# Altium PCB PCB1.PcbDoc
Units mil, origin at the board's own origin, x right, y up, seen from the top; angles counter-clockwise.
Board outline 3885.03 x 1650.02 mil, 2 copper layers (Top Layer, Bottom Layer); 11 components, 7 nets, 23 pads, 0 vias.
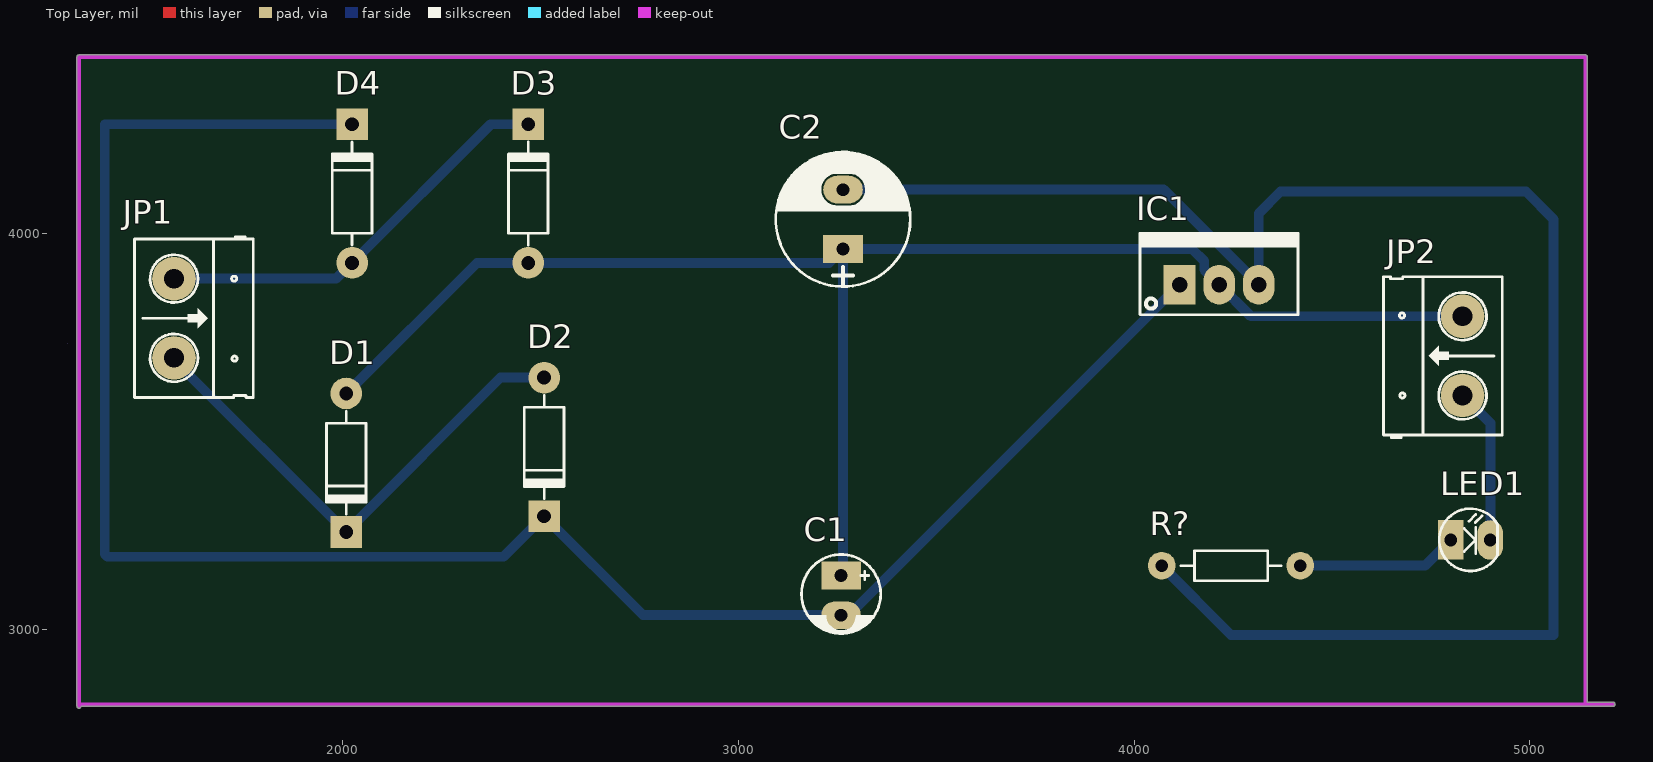
[diagram p0: Top Layer view]
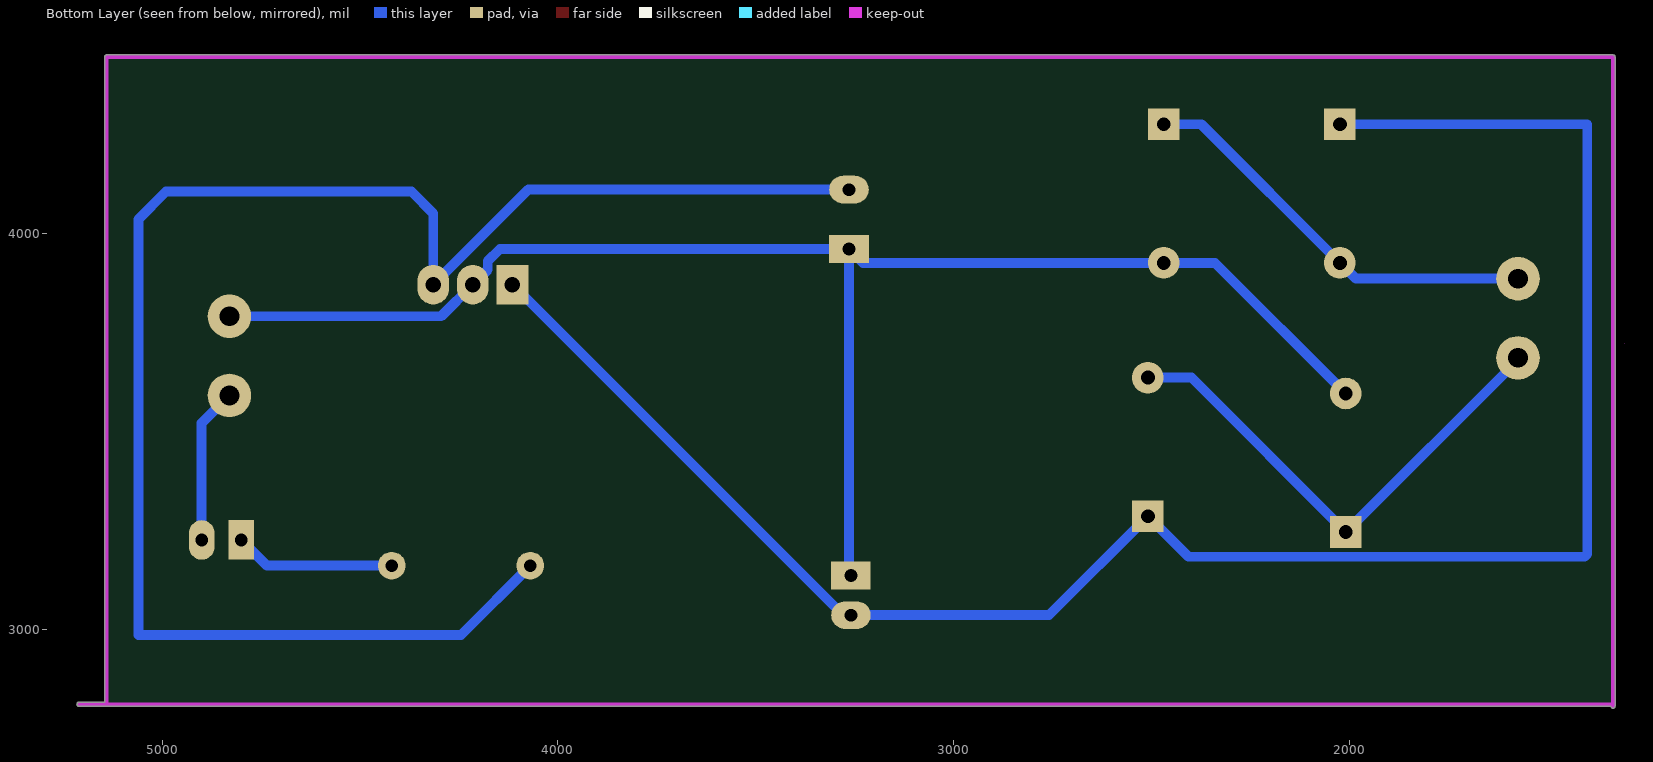
[diagram p1: Bottom Layer view, seen from below]
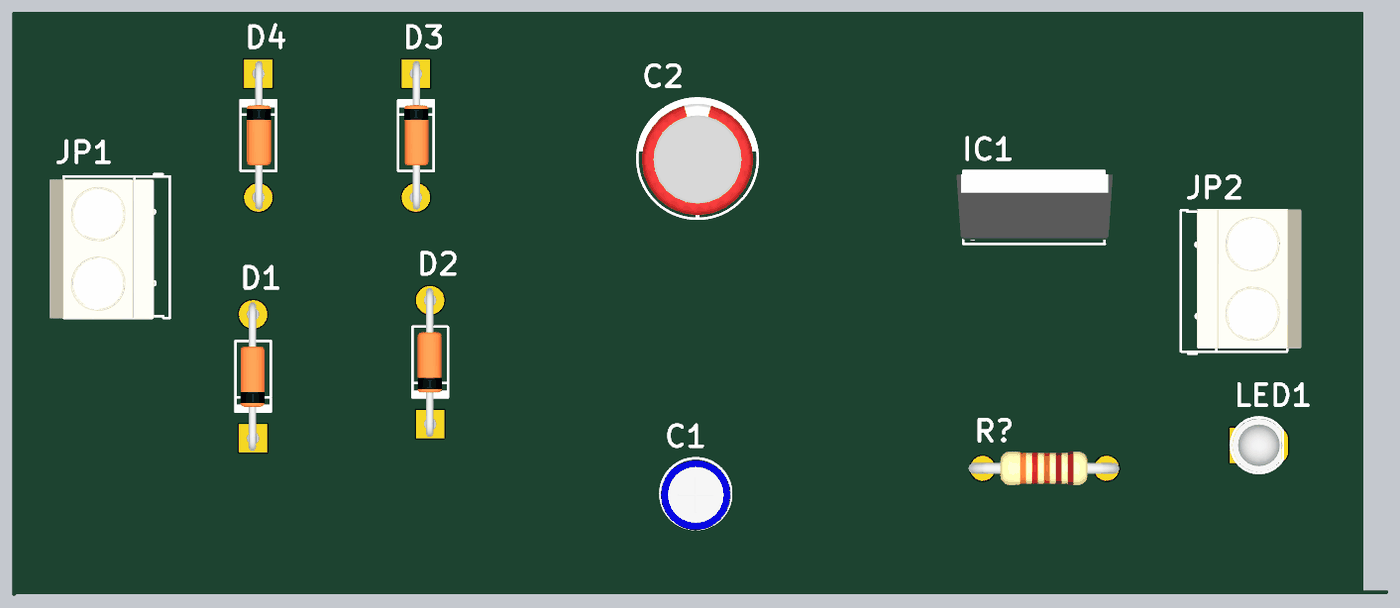
[diagram p2: 3D render of the assembled board from above, using the file's embedded part models]

## Layer stack, top to bottom
Top Solder: solder mask 0.4, Solder Resist, Dk 3.5
Top Layer: signal copper 1.4
Dielectric 1: dielectric 12.6, FR-4, Dk 4.8
Bottom Layer: signal copper 1.4
Bottom Solder: solder mask 0.4, Solder Resist, Dk 3.5

## Board outline
1329.98,2805 ccw(c1335,2805) 1338.56,2801.47 1338.55,2801.45 1342.08,2804.99 5210,2804.99 ccw(c5210,2810) 5215.02,2810 ccw(c5210,2810) 5210,2815.01 5145.02,2815.01 5145.02,4445 ccw(c5140,4445) 5140,4450.02 1335,4450.02 ccw(c1335,4445) 1329.98,4445
cut-out: 1305,3720

## Design rules (kind name [scope] priority, off if disabled: settings)
Clearance [All] p1: gap=10 ignorepadtopadclearanceinfootprint=FALSE except(0: Arc-Hole Track-Hole SMDPad-Hole THPad-Hole Via-Hole Fill-Hole Poly-Hole Region-Hole Text-Hole)
PolygonConnect [All] p1: connectstyle=Relief reliefconductorwidth=10 reliefentries=4 polygonreliefangle="90 Angle" airgapwidth=10
RoomDefinition Sheet1 [InComponentClass('Sheet1')] p1: confinementstyle=ConfineIn formatcopy=TRUE lockcomponents=FALSE outline 6955,1055 9905,1055 9905,1610 6955,1610
RoutingVias [All] p1: holewidth=28 width=50 viastyle="Through Hole" minholewidth=28 minwidth=50 maxholewidth=28 maxwidth=50
SolderMaskExpansion [All] p1: expansion=4
Width [All] p1: maxlimit=25 minlimit=25 preferedwidth=25
30 further rules are at their usual default settings.

## Components (designator, comment, footprint, x,y, rotation, side; value= is the part's Value field where it differs from the comment)
C1 "100uF" CP1/2 3260,3135 r270 top value=10uF/50V
C2 "400uF" CP1.5/3.4 3265,3960 r90 top value=100uF/35V/50V
D1 "1N4007" D1A 2010,3595 r90 top
D2 "1N4007" D1A 2510,3635 r90 top
D3 "1N4007" D1A 2470,3925 r270 top
D4 "1N4007" D1A 2025,3925 r270 top
IC1 "LM7805" QTO-220 4115,3870 r0 top
JP1 "Header 2_1" HED2 1575,3885 r270 top value="Header 2"
JP2 "Header 2_1" HED2 4830,3590 r90 top value="Header 2"
LED1 "LED" LED-3 4800,3225 r0 top value="LED 3 ly Single Colour"
R? "47k" R1/4W 4070,3160 r0 top value="R1/4W - 1K"

## Footprints (in the part's own frame and the unit in brackets; to place one, negate y for a bottom-side part, rotate by r counter-clockwise, add the part's x,y. Pads: shape width x height; smd on the part's side, far side on the other; paste and mask are expansions set on the pad)
CP1.5/3.4 [mil] "Tu hoa 220->470uF,16V, 470uF/16V,25V"
  rect 70x100 hole 32: 1(0,0)
  oval 70x100 hole 32: 2(150,0)
  silkscreen extent -95,-170 245,170, body extent -85,-157 230,157, height 446
CP1/2 [mil] "Tu hoa < 22uF/16>50V"
  rect 70x100 hole 32: 1(0,0)
  oval 70x100 hole 32: 2(100,0)
  silkscreen extent -53,-100 146,100, body extent -49,-99 149,99, height 287
D1A [mil] "Diode 1A, W 100mil, L 350mil"
  round 80 hole 35: 1(0,0)
  rect 80x80 hole 35: 2(-350,0)
  silkscreen extent -305,-50 -45,50, body extent -386,-33 34,36, height 84
HED2 [mil] "Header 2, 2 pin, hight 300mil, Pin to Pin 200, Colour Green"
  round 110 hole 50: 1(0,0) 2(200,0)
  silkscreen extent -106,-100 300,200, body extent -92,-140 302,155, height 394
LED-3 [mil] "LED 2 PIN, 3ly Only colour"
  rect 65x100 hole 32: 1(0,0)
  oval 65x100 hole 32: 2(100,0)
  silkscreen extent -29,-78 118,79, body extent -25,-75 113,75, height 217
QTO-220 [mil] "TO-220 - 1-2-3"
  rect 80x100 hole 39: 1(0,0)
  oval 80x100 hole 39: 2(100,0) 3(200,0)
  silkscreen extent -100,-76 300,130, body extent -119,-64 322,121, height 755
R1/4W [mil] "R 1/4W, 2 Pin, 350mil"
  round 70 hole 31: 1(0,0) 2(350,0)
  silkscreen extent 48,-38 302,38, body extent -40,-47 386,47, height 111

## Part data
C1: library part CP1, "Cap P  0,1uF < 22uF , 16 - 50V", Description 1="10 => 220uF/6,3V/10V - 10uF => 100uF/16V", Description 2="0,1uF => 33uF/50V - 10uF => 22uF/63V", Description 3="0,47uF => 10uF/100V"
C2: library part CP3, "Cap 100uF/35V - 470uF/16V", Description 1="1000uF/6,3V - 470uF/16V - 330uF - 25V", Description 2="220uF/35V - 100uF/50V - 63V - 4,7uF/200V", Description 3="22uF => 33uF100V - 3,3uF => 4,7uF/250V", Description 4="2,2uF =>3,3uF/350 - 2,2uF/400V - 1uF/450V"
D1 D2 D3 D4: library part D1A, "Diode 1A"
IC1: library part LM78xx, "On ap +, from + 5 to + 24VDC", =LM7808
JP1 JP2: "Header, 2-Pin", Manufacturer="Generic Components", Class=Connector
LED1: "LED Single colour Green and Red"
R?: library part R1/4W, "Resistor 1/4W"

## Nets (pads, with @x,y where several pads share a name; then routed paths per layer and width w, separated by ;. In a path a pad name is that pad's centre, name@x,y a point inside that pad or via, vN(x,y) a via of type N, cw(c..) or ccw(c..) an arc to the next point about the centre after c; other vN are vias at no path point)
GND: C1.1 C2.1 D1.1 D3.1 IC1.2 JP2.2 | length 3881.5
  Bottom Layer w25: D1.1 2340,3925 D3.1 3230,3925 C2.1 ; C1.1 3265,3140 C2.1 ; JP2.2 4295,3790 IC1.2 4177.5,3907.5 4177.5,3929.32 4146.82,3960 C2.1
NetC1_2: C1.2 D2.2 D4.2 IC1.1 | length 4920
  Bottom Layer w25: D4.2 1400,4275 1400,3190 1407.5,3182.5 2407.5,3182.5 D2.2 2760,3035 C1.2 3280,3035 IC1.1
NetC2_2: C2.2 IC1.3 R?.1 | length 4238.7
  Bottom Layer w25: C2.2 4075,4110 IC1.3 4315,4050 4370,4105 4990,4105 5060,4035 5060,2985 4245,2985 R?.1
NetD1_2: D1.2 D2.1 JP1.2 | length 1281.7
  Bottom Layer w25: JP1.2 1575,3680 D1.2 2400,3635 D2.1
NetD3_2: D3.2 D4.1 JP1.1 | length 1056.5
  Bottom Layer w25: JP1.1 1985,3885 D4.1 2375,4275 D3.2
NetJP2_1: JP2.1 LED1.2 | length 394
  Bottom Layer w25: JP2.1 4900,3520 LED1.2
NetLED1_1: LED1.1 R?.2 | length 406.9
  Bottom Layer w25: R?.2 4735,3160 LED1.1

## Keep-outs
Keep-Out Layer:
  lines w10: 5140,2810 5140,4445 1335,4445 1335,2805 1340,2810 5210,2810